# EAGLE board ICS40300-Silicon-Mic_Rev-B (EAGLE 8.2.1)
REV: B
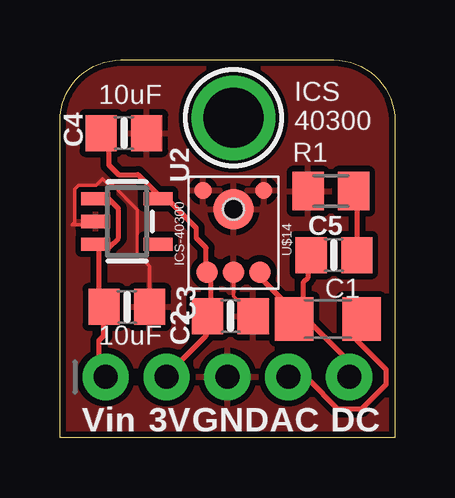
[diagram p0: board, top side]
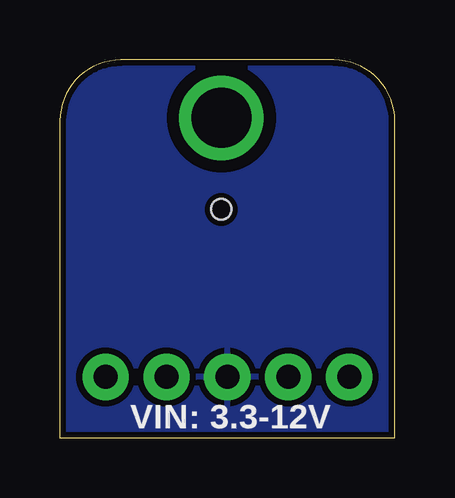
[diagram p1: board, bottom side, seen from below]

Size 13.97 x 15.75 mm. Coordinates in mm from the lower left corner, seen from the top.
Outline: 0,0 0,13.21 arc-90 2.54,15.75 11.43,15.75 arc-90 13.97,13.21 13.97,0 0,0
Copper layers (1*16): Top 0.035mm / dielectric 1.5mm / Bottom 0.035mm
Design rules "adafruit": minimum track width 8mil, minimum drill 15.5mil, track to track 8mil, track to pad 8mil, pad to pad 8mil, via to via 8mil, smd to smd 8mil, copper to edge 10mil, drill to drill 8mil, minimum pad ring 10mil, minimum via ring 8mil, stop-mask expansion 2mil, vias tented up to drill 20mil, thermal gap 10mil

## Footprints (pad centres in the part's own frame; a part is rotated, then mirrored left to right if it is on the bottom)
C3216 = smd 1.6 x 1.8: 1 -1.4,0; 2 1.4,0
0805-NO = smd 1.3 x 1.5: 1 -0.95,0; 2 0.95,0
1X05_ROUND_76 = drill 1 pad 1.93: 1 -5.08,0; 2 -2.54,0; 3 0,0; 4 2.54,0; 5 5.08,0
M0805 = smd 1.3 x 1.6: 1 -0.95,0; 2 0.95,0
SOT23-5 = smd 0.55 x 1.2: 1 -0.95,-1.3; 2 0,-1.3; 3 0.95,-1.3; 4 0.95,1.3; 5 -0.95,1.3
MOUNTINGHOLE_2.5_PLATED = drill 2.5 pad 3.2: P$1 0,0
ICS-40300 = smd 0.9 x 0.9: GND -2.62,0; OUT -2.62,-1.1; VDD -2.62,1.1 | smd 0.7 x 0.7: GND1 0.79,1.27; GND2 0.79,-1.27 | smd 1.68 x 1.68: GND3 0,0 | hole 0.85: 0,0

## Placement (x,y rotation side)
C1  [C3216]  11.18,4.95 0 top
C2  0.1uF  [0805-NO]  7.11,5.08 0 top
C3  10uF  [0805-NO]  2.79,5.46 0 top
C4  10uF  [0805-NO]  2.67,12.7 0 top
C5  10uF  [0805-NO]  11.43,7.62 180 top
JP1  [1X05_ROUND_76]  6.99,2.54 0 top
R1  [M0805]  11.3,10.29 180 top
U2  MIC5225-3.3  [SOT23-5]  2.79,9.02 270 top
U$12  MOUNTINGHOLE2.5  [MOUNTINGHOLE_2.5_PLATED]  7.24,13.34 0 top
U$14  ICS-40300  [ICS-40300]  7.24,9.53 90 top

## Library data of the parts
C1 R1 = adafruit
C2-C5 JP1 U2 = microbuilder
U$12 = microbuilder; BOM: EXCLUDE
U$14 = CMU-ArtFab

## Nets
GND: C2.2 C3.2 C4.2 JP1.3 R1.2 U2.2 U$14.GND U$14.GND1 U$14.GND2 U$14.GND3
N$1: C1.1 C5.2 JP1.5 U$14.OUT
N$2: C1.2 JP1.4
N$3: C5.1 R1.1
VDD: C2.1 C4.1 JP1.2 U2.5 U$14.VDD
VIN: C3.1 JP1.1 U2.1 U2.3

## Tracks (layer width: path | path; a pad name or v marks a point on that pad's centre or on a via)
GND
  Top 0.152: U$14.GND 7.24,5.9 C2.2 | C3.2 3.74,7.15 3.21,7.68 3.21,9.52 2.21,10.52 2.05,10.52 1.78,10.79 1.5,10.52 0.78,10.52 0.61,10.36 0.61,9 0.51,8.89 1.37,8.89 U2.2
  pour Top (isolate 0.254): 0,0 0,15.88 13.97,15.88 13.97,0
  pour Bottom (isolate 0.254): 0,0.25 0,16.38 13.97,16.38 13.97,0
N$1
  Top 0.203: 9.75,5.28 9.96,5.08 C1.1 | 9.75,5.28 8.53,6.5 8.53,6.71 U$14.OUT | 9.75,5.28 10.16,5.69 10.16,6.5 10.36,6.71 10.36,7.52 C5.2 | 9.75,5.28 C1.1 | C1.1 9.96,4.88 10.36,4.88 11.99,3.25 11.99,2.64 JP1.5
N$2
  Top 0.203: C1.2 12.39,4.88 12.39,4.06 13.61,2.85 13.61,2.23 12.6,1.22 11.58,1.22 10.36,2.44 9.55,2.44 JP1.4
N$3
  Top 0.203: C5.1 12.39,7.59 12.39,10.03 R1.1
VDD
  Top 0.203: C4.1 1.83,12.6 2.03,12.39 2.03,11.38 2.44,10.97 3.25,10.97 4.06,10.16 U2.5 4.27,9.96 4.47,9.96 5.69,8.74 5.69,8.33 6.1,7.92 6.1,6.91 U$14.VDD 6.3,6.71 6.3,5.08 C2.1 6.1,5.08 6.1,4.27 4.47,2.64 JP1.2
VIN
  Top 0.203: 1.63,7.92 1.63,5.69 1.83,5.49 C3.1 1.83,5.28 1.83,4.27 1.63,4.06 1.63,2.85 1.83,2.64 JP1.1 | 1.63,7.92 2.03,7.92 2.44,8.33 2.44,9.55 2.03,9.96 1.63,9.96 U2.1 | 1.63,7.92 U2.3

## Text on the board
tPlace: ICS / 40300 | Vin | 3V | GND | AC | DC
bPlace: VIN: 3.3-12V